# EAGLE board JesseMakeISC1 (EAGLE 7.5.0)
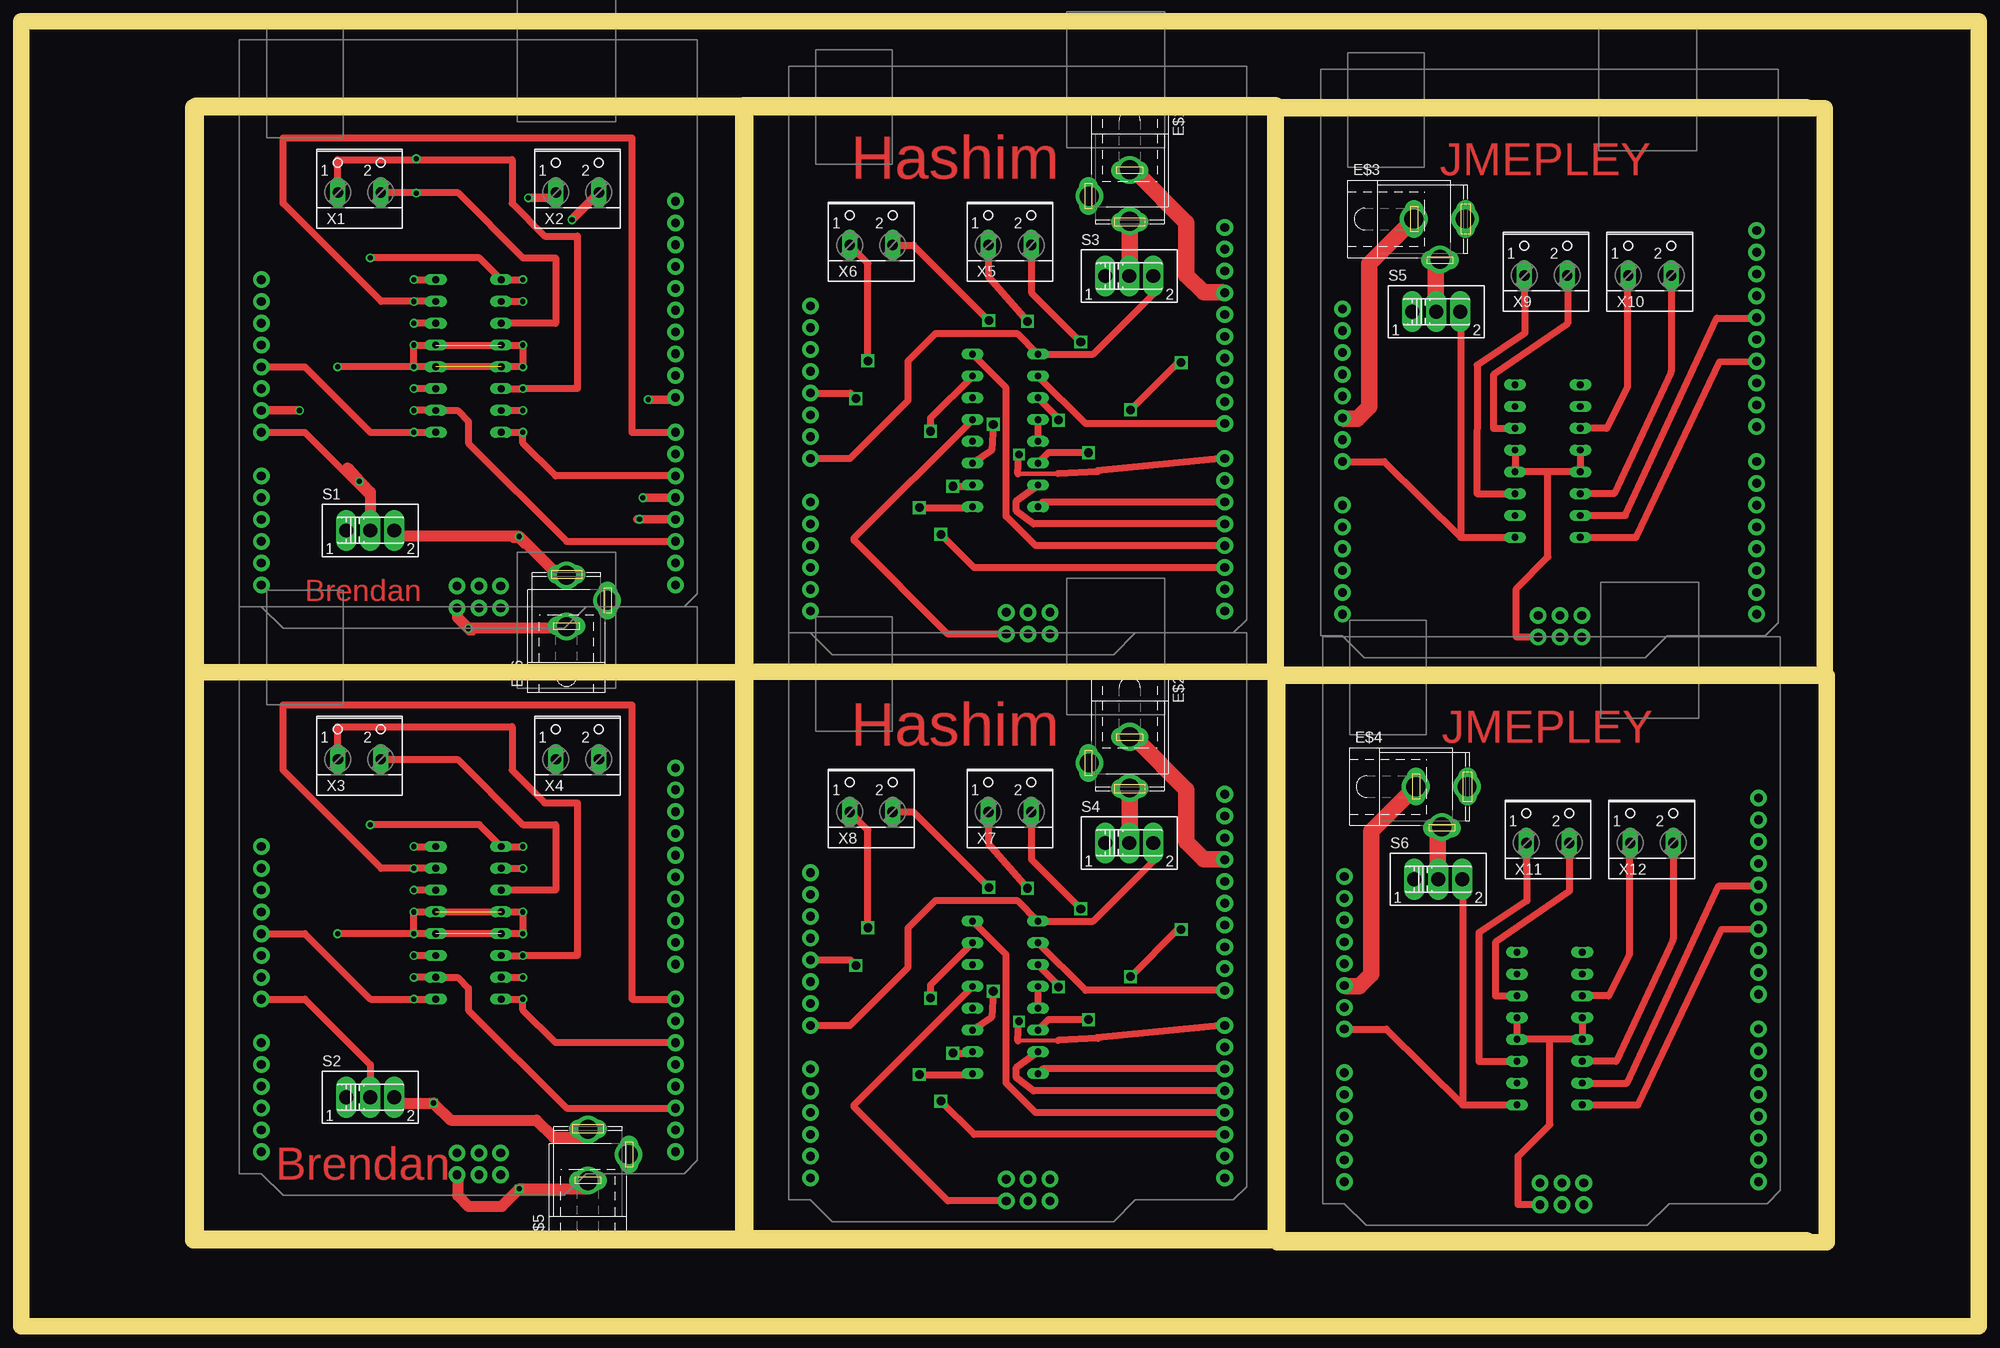
[diagram p0: board, top side]
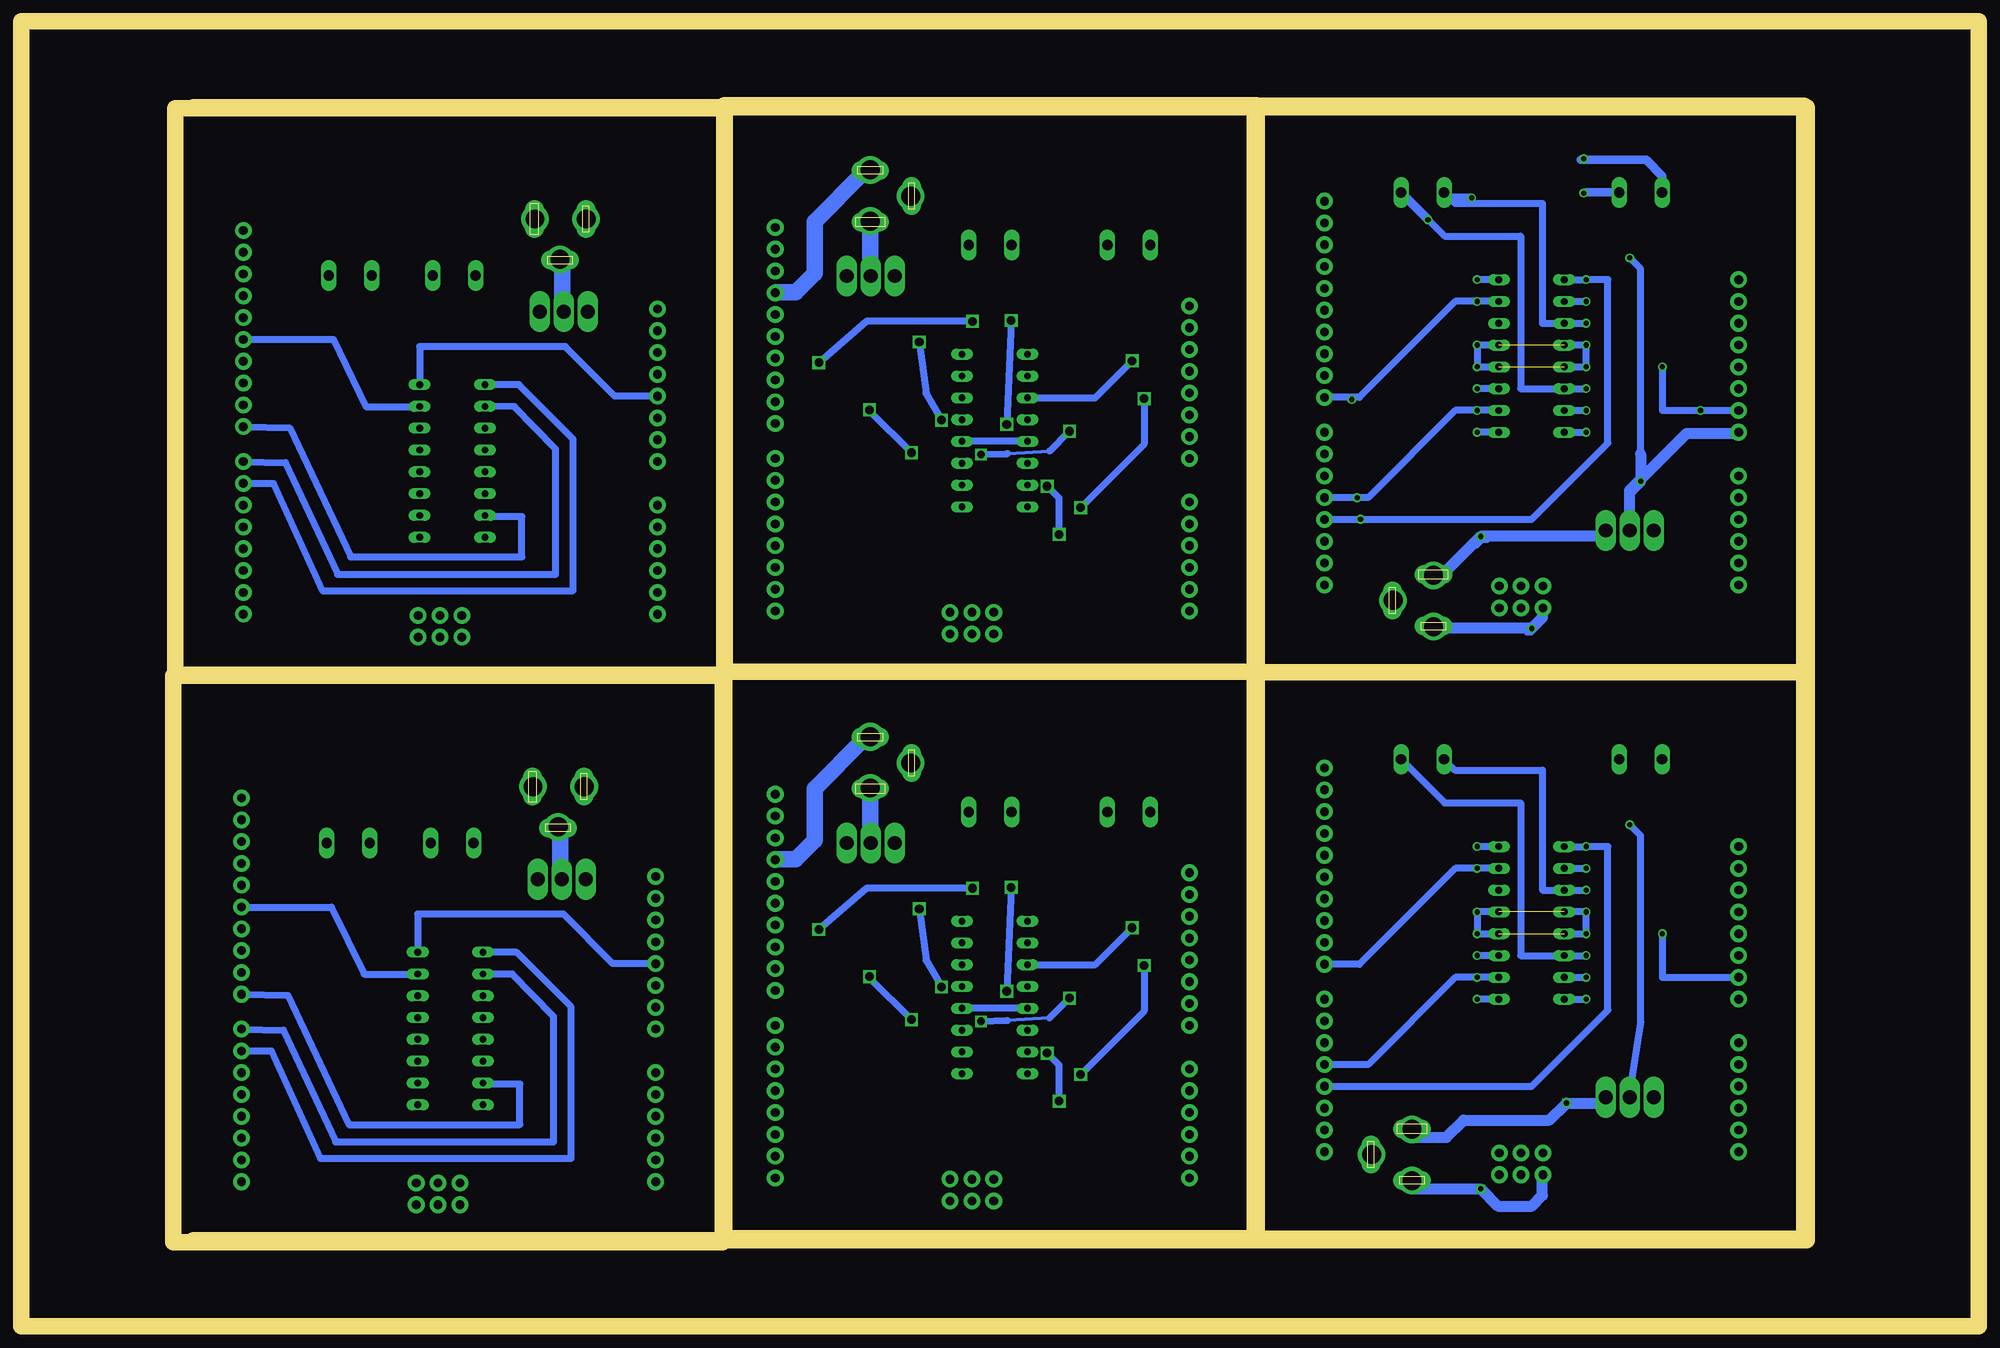
[diagram p1: board, bottom side, seen from below]

Size 228 x 152 mm. Coordinates in mm from the lower left corner, seen from the top.
Outline: 208,10 20,10 20,142 208,142
Outline: 84.32,10.16 120.32,10.16
Outline: 20.32,90.16 20.32,76.16
Outline: 20.32,76.16 20.32,10.16 84.32,10.16
Outline: 20.32,76.16 84.32,76.16 84.32,10.16
Outline: 146.11,10.21 184.11,10.21
Outline: 84.11,90.22 84.11,76.22
Outline: 84.11,76.22 84.11,10.21 146.11,10.21
Outline: 84.11,76.22 146.11,76.22 146.11,10.21
Outline: 0,0 0,152 228,152 228,0 0,0
Outline: 20.32,76.2 20.32,142.2 84.32,142.2 84.32,76.2 20.32,76.2
Outline: 84.11,76.25 84.11,142.25 146.11,142.25 146.11,76.25 84.11,76.25
Outline: 146.08,75.9 146.08,141.9 210.08,141.9 210.08,75.9 146.08,75.9
Outline: 146.3,9.78 146.3,75.78 210.3,75.78 210.3,9.78 146.3,9.78
Copper layers (1*16): Top 0.035mm / dielectric 1.5mm / Bottom 0.035mm
Design rules "default": minimum track width 10mil, minimum drill 0.6mm, track to track 8mil, track to pad 8mil, pad to pad 8mil, via to via 8mil, smd to smd 8mil, copper to edge 40mil, drill to drill 8mil, minimum pad ring 10mil, minimum via ring 8mil, stop-mask expansion 4mil, vias tented up to drill 0mil, thermal gap 10mil

## Footprints (pad centres in the part's own frame; a part is rotated, then mirrored left to right if it is on the bottom)
5.5-2.5-BARRELCONNECTOR = drill 0.8 pad 2.184 long: 1 -3,0; 2 0,-4.8 | drill 1 pad 2.184 long: 3 3,0 | drill 2.2: P$1 -3.048,0; P$2 2.921,0; P$3 0,-4.699
ARDUINO_R3 = drill 1.016 pad 1.93: 3.3V 35.56,2.54; 5V 38.1,2.54; A0 50.8,2.54; A1 53.34,2.54; A2 55.88,2.54; A3 58.42,2.54; A4 60.96,2.54; A5 63.5,2.54; AREF 23.876,50.8; D0 63.5,50.8; D1 60.96,50.8; D2 58.42,50.8; D3 55.88,50.8; D4 53.34,50.8; D5 50.8,50.8; D6 48.26,50.8; D7 45.72,50.8; D8 41.656,50.8; D9 39.116,50.8; D10 36.576,50.8; D11 34.036,50.8; D12 31.496,50.8; D13 28.956,50.8; GND@1 40.64,2.54; GND@2 43.18,2.54; GND@3 26.416,50.8; GND@4 66.18,25.35; IOREF 30.48,2.54; MISO 63.64,30.43; MOSI 66.18,27.89; NC 27.94,2.54; RESET@1 33.02,2.54; RESET@2 63.64,25.35; SCK 63.64,27.89; SCL 18.796,50.8; SDA 21.336,50.8; VCC 66.18,30.43; VIN 45.72,2.54
SLIDE_SWITCH = drill 1.6 long: 1 -2.794,0; 2 0,0; 3 2.794,0
DIP16 = drill 0.8 long: P1 -8.89,-3.81; P2 -6.35,-3.81; P3 -3.81,-3.81; P4 -1.27,-3.81; P5 1.27,-3.81; P6 3.81,-3.81; P7 6.35,-3.81; P8 8.89,-3.81; P9 8.89,3.81; P10 6.35,3.81; P11 3.81,3.81; P12 1.27,3.81; P13 -1.27,3.81; P14 -3.81,3.81; P15 -6.35,3.81; P16 -8.89,3.81
2PIN-SCREW-TERMINAL = drill 1.194 long: 1 -2.5,-1.27; 2 2.5,-1.27

## Placement (x,y rotation side)
E$1  [5.5-2.5-BARRELCONNECTOR]  129.11,131.66 270 top
E$2  [5.5-2.5-BARRELCONNECTOR]  129.11,65.61 270 top
E$3  [5.5-2.5-BARRELCONNECTOR]  165.26,128.99 0 top
E$4  [5.5-2.5-BARRELCONNECTOR]  165.48,62.87 0 top
E$5  [5.5-2.5-BARRELCONNECTOR]  66,20 90 top
E$6  [5.5-2.5-BARRELCONNECTOR]  63.5,84.55 90 top
J1  ARDUINO_UNO_R3  [ARDUINO_R3]  25.4,149.86 270 top
J2  ARDUINO_UNO_R3  [ARDUINO_R3]  25.4,83.82 270 top
J3  ARDUINO_UNO_R3  [ARDUINO_R3]  89.38,146.81 270 top
J4  ARDUINO_UNO_R3  [ARDUINO_R3]  89.38,80.77 270 top
J5  ARDUINO_UNO_R3  [ARDUINO_R3]  151.35,146.45 270 top
J6  ARDUINO_UNO_R3  [ARDUINO_R3]  151.57,80.33 270 top
S1  [SLIDE_SWITCH]  40.64,92.71 0 top
S2  [SLIDE_SWITCH]  40.64,26.67 0 top
S3  [SLIDE_SWITCH]  129.06,122.34 0 top
S4  [SLIDE_SWITCH]  129.06,56.3 0 top
S5  [SLIDE_SWITCH]  164.83,118.19 0 top
S6  [SLIDE_SWITCH]  165.06,52.07 0 top
U$1  MOTOR_DRIVERDIP16  [DIP16]  52.07,113.03 90 top
U$2  MOTOR_DRIVERDIP16  [DIP16]  52.07,46.99 90 top
U$3  MOTOR_DRIVERDIP16  [DIP16]  114.61,104.34 90 top
U$4  MOTOR_DRIVERDIP16  [DIP16]  114.61,38.3 90 top
U$5  MOTOR_DRIVERDIP16  [DIP16]  177.81,100.8 270 top
U$6  MOTOR_DRIVERDIP16  [DIP16]  178.03,34.68 270 top
X1  [2PIN-SCREW-TERMINAL]  39.37,133.35 0 top
X2  [2PIN-SCREW-TERMINAL]  64.77,133.35 0 top
X3  [2PIN-SCREW-TERMINAL]  39.37,67.31 0 top
X4  [2PIN-SCREW-TERMINAL]  64.77,67.31 0 top
X5  [2PIN-SCREW-TERMINAL]  115.15,127.22 0 top
X6  [2PIN-SCREW-TERMINAL]  98.99,127.22 0 top
X7  [2PIN-SCREW-TERMINAL]  115.15,61.17 0 top
X8  [2PIN-SCREW-TERMINAL]  98.99,61.17 0 top
X9  [2PIN-SCREW-TERMINAL]  177.6,123.68 0 top
X10  [2PIN-SCREW-TERMINAL]  189.69,123.68 0 top
X11  [2PIN-SCREW-TERMINAL]  177.82,57.56 0 top
X12  [2PIN-SCREW-TERMINAL]  189.92,57.56 0 top

## Library data of the parts
E$1-E$6 J1-J6 S1-S6 U$1-U$6 = ISCTrainingProgram
X1-X12 = ISCTrainingProgram; MPN: 237-102; OC_FARNELL: unknown; OC_NEWARK: 70K9898

## Nets
1A: J5.D7 U$5.P2
1A1: J6.D7 U$6.P2
2A: J5.D8 U$5.P7
2A1: J6.D8 U$6.P7
3A: J5.D13 U$5.P10
3A1: J6.D13 U$6.P10
4A: J5.D12 U$5.P15
4A1: J6.D12 U$6.P15
EN1: J5.D6 U$5.P1
EN2: J5.D11 U$5.P9
EN3: J6.D11 U$6.P9
EN4: J6.D6 U$6.P1
GND: U$3.P4 U$3.P5 U$3.P13
GND1: U$4.P4 U$4.P5 U$4.P13
GND2: J5.GND@4 U$5.P4 U$5.P5 U$5.P12 U$5.P13
GND3: J6.GND@4 U$6.P4 U$6.P5 U$6.P12 U$6.P13
N$1: U$1.P3 X1.1
N$2: U$1.P6 X1.2
N$3: U$1.P11 X2.1
N$4: U$1.P14 X2.2
N$5: J1.5V U$1.P16
N$6: J1.GND@2 U$1.P4 U$1.P5 U$1.P12 U$1.P13
N$8: J1.VIN S1.2 U$1.P8
N$9: J1.D2 U$1.P15
N$10: J1.D3 U$1.P9
N$11: J1.D4 U$1.P2
N$12: J1.D5 U$1.P1
N$13: J1.D7 U$1.P10
N$14: J1.D8 U$1.P7
N$15: U$2.P3 X3.1
N$16: U$2.P6 X3.2
N$17: U$2.P11 X4.1
N$18: U$2.P14 X4.2
N$19: J2.5V U$2.P16
N$20: J2.GND@2 U$2.P4 U$2.P5 U$2.P12 U$2.P13
N$21: J2.VIN S2.2
N$22: J2.D2 U$2.P15
N$23: J2.D3 U$2.P9
N$24: J2.D4 U$2.P2
N$25: J2.D5 U$2.P1
N$26: J2.D7 U$2.P10
N$27: J2.D8 U$2.P7
N$28: U$2.P8
N$29: U$3.P3 X5.1
N$30: U$3.P6 X5.2
N$31: U$3.P11 X6.1
N$32: U$3.P14 X6.2
N$33: J3.5V U$3.P16
N$34: J3.GND@4 U$3.P12
N$35: J3.VIN S3.3 U$3.P8
N$36: J3.D2 U$3.P15
N$37: J3.D3 U$3.P9
N$38: J3.D8 U$3.P7
N$39: J3.D7 U$3.P10
N$40: J3.D4 U$3.P2
N$41: J3.D5 U$3.P1
N$42: U$4.P3 X7.1
N$43: U$4.P6 X7.2
N$44: U$4.P11 X8.1
N$45: U$4.P14 X8.2
N$46: J4.5V U$4.P16
N$47: J4.GND@4 U$4.P12
N$48: J4.VIN S4.3 U$4.P8
N$49: J4.D2 U$4.P15
N$50: J4.D3 U$4.P9
N$51: J4.D8 U$4.P7
N$52: J4.D7 U$4.P10
N$53: J4.D4 U$4.P2
N$54: J4.D5 U$4.P1
N$55: U$5.P6 X9.1
N$56: U$5.P3 X9.2
N$57: U$5.P14 X10.1
N$58: U$5.P11 X10.2
N$59: J5.5V U$5.P16
N$60: J5.VIN S5.3 U$5.P8
N$61: U$6.P6 X11.1
N$62: U$6.P3 X11.2
N$63: U$6.P14 X12.1
N$64: U$6.P11 X12.2
N$65: J6.5V U$6.P16
N$66: J6.VIN S6.3 U$6.P8
S$5: E$3.P$1
S$7: E$4.P$1

## Tracks (layer width: path | path; a pad name or v marks a point on that pad's centre or on a via)
1A
  Bottom 0.813: J5.D7 197.26,100.6 191.16,87.58 165.76,87.58 165.76,102.19 170.57,107.14 U$5.P2
1A1
  Bottom 0.813: J6.D7 197.49,34.48 191.39,21.46 165.99,21.46 165.99,36.07 170.79,41.02 U$6.P2
2A
  Bottom 0.813: J5.D8 196.75,104.67 189.64,89.61 169.7,89.61 169.7,94.31 174,94.31 U$5.P7
2A1
  Bottom 0.813: J6.D8 196.98,38.55 189.87,23.5 169.93,23.5 169.93,28.19 174.22,28.19 U$6.P7
3A
  Top 0.813: U$5.P10 186.85,94.45 197.51,117.43 202.15,117.43 J5.D13
3A1
  Top 0.813: U$6.P10 187.07,28.33 197.74,51.31 202.37,51.31 J6.D13
4A
  Bottom 0.813: J5.D12 191.67,114.95 187.86,107.14 U$5.P15
4A1
  Bottom 0.813: J6.D12 191.9,48.83 188.09,41.02 U$6.P15
EN1
  Bottom 0.813: J5.D6 198.66,98.19 192.94,85.68 163.73,85.68 163.73,103.33 170.06,109.68 U$5.P1
EN2
  Top 0.813: U$5.P9 187.99,91.91 188.12,91.9 197.83,112.35 J5.D11
EN3
  Top 0.813: U$6.P9 188.21,25.79 188.34,25.78 198.06,46.23 J6.D11
EN4
  Bottom 0.813: J6.D6 198.88,32.07 193.17,19.56 163.96,19.56 163.96,37.21 170.29,43.56 U$6.P1
GND
  Top 0.813: U$3.P5 U$3.P4
  Bottom 0.813: U$3.P13 U$3.P4
GND1
  Top 0.813: U$4.P5 U$4.P4
  Bottom 0.813: U$4.P13 U$4.P4
GND2
  Top 0.813: U$5.P4 U$5.P5 177.83,99.53 | U$5.P13 U$5.P12 177.83,99.53 | J5.GND@4 174.15,80.27 174.15,85.93 177.83,89.61 177.83,99.53
GND3
  Top 0.813: U$6.P4 U$6.P5 178.05,33.41 | U$6.P13 U$6.P12 178.05,33.41 | J6.GND@4 174.37,14.15 174.37,19.81 178.05,23.5 178.05,33.41
N$1  (via drill 0.6)
  Top 0.813: U$1.P3 v58.42,109.22 64.77,109.22 64.77,127 60.96,127 57.15,130.81 57.15,135.89 36.83,135.89 36.83,132.12 X1.1
  Bottom 0.813: U$1.P3 v58.42,109.22
N$2
  Top 0.813: X1.2 50.8,132.08 58.42,124.46 62.23,124.46 62.23,116.84 U$1.P6
N$3  (via drill 0.6)
  Top 0.813: U$1.P11 v45.72,116.84
  Bottom 0.813: v45.72,116.84 U$1.P11 50.8,116.84 50.8,130.81 61,130.81 X2.1
N$4  (via drill 0.6)
  Top 0.813: U$1.P14 v45.72,109.22
  Bottom 0.813: v45.72,109.22 U$1.P14 53.34,109.22 53.34,127 62.19,127 X2.2
N$5  (via drill 0.6)
  Top 0.813: J1.5V 33.02,111.76 40.64,104.14 v45.72,104.14 U$1.P16
  Bottom 0.813: U$1.P16 v45.72,104.14
N$6  (via drill 0.6)  (2 unrouted)
  Top 0.813: v45.72,111.76 U$1.P13 U$1.P4 v58.42,111.76 v58.42,114.3 U$1.P12 v45.72,114.3 v45.72,111.76 | v45.72,111.76 v36.83,111.76
  Top 1.016: J1.GND@2 v32.38,106.68
  Bottom 0.813: U$1.P13 v45.72,111.76 v45.72,114.3 U$1.P12 | U$1.P5 v58.42,114.3 v58.42,111.76 U$1.P4 | v36.83,111.76 36.83,106.68 v32.38,106.68 J1.GND@2
N$8  (via drill 0.6)
  Top 0.813: v58.42,121.92 U$1.P8 53.34,124.46 v40.64,124.46 | J1.VIN 33.02,104.14 40.64,96.52 40.64,93.34 S1.2
  Top 1.27: 38,100 40,97.8 40.64,97.16 40.64,93.34
  Bottom 0.813: U$1.P8 v58.42,121.92 | 39.37,101.6 39.37,123.19 v40.64,124.46
  Bottom 1.27: 40.64,93.34 40.64,97.16 | 40.64,97.16 40.64,97.36 34,104 28,104 | 39.37,101.6 v39.37,98.42 40.64,97.16
N$9  (via drill 0.6)
  Top 0.813: J1.D2 63.5,91.44 52.07,102.87 52.07,105.41 50.8,106.68 U$1.P15 v45.72,106.68
  Bottom 0.813: U$1.P15 v45.72,106.68
N$10  (via drill 0.6)
  Top 0.813: v45.72,121.92 U$1.P9
  Top 1.016: 71.75,93.98 J1.D3
  Bottom 0.813: U$1.P9 v45.72,121.92 43.18,121.92 43.18,102.87 52.07,93.98 J1.D3
N$11  (via drill 0.6)
  Top 0.813: U$1.P2 v58.42,106.68
  Top 1.016: v72.39,96.52 J1.D4
  Bottom 0.813: v58.42,106.68 U$1.P2 60.96,106.68 71.12,96.52 v72.39,96.52 J1.D4
N$12  (via drill 0.6)
  Top 0.813: U$1.P1 v58.42,104.14 58.42,102.87 62.23,99.06 J1.D5
  Bottom 0.813: U$1.P1 v58.42,104.14
N$13  (via drill 0.6)
  Top 0.813: v45.72,119.38 U$1.P10 41.91,119.38 30.48,130.81 30.48,138.43 71.12,138.43 71.12,104.14 J1.D7
  Bottom 0.813: U$1.P10 v45.72,119.38
N$14  (via drill 0.6)
  Top 0.813: U$1.P7 v58.42,119.38
  Bottom 0.813: v58.42,119.38 U$1.P7 60.96,119.38 72.14,108.2 J1.D8
N$15  (via drill 0.6)
  Top 0.813: U$2.P3 v58.42,43.18 64.77,43.18 64.77,60.96 60.96,60.96 57.15,64.77 57.15,69.85 36.83,69.85 36.83,66.08 X3.1
  Bottom 0.813: U$2.P3 v58.42,43.18
N$16
  Top 0.813: X3.2 50.8,66.04 58.42,58.42 62.23,58.42 62.23,50.8 U$2.P6
N$17  (via drill 0.6)
  Top 0.813: U$2.P11 v45.72,50.8
  Bottom 0.813: v45.72,50.8 U$2.P11 50.8,50.8 50.8,64.77 61,64.77 X4.1
N$18  (via drill 0.6)
  Top 0.813: U$2.P14 v45.72,43.18
  Bottom 0.813: v45.72,43.18 U$2.P14 53.34,43.18 53.34,60.96 62.19,60.96 X4.2
N$19  (via drill 0.6)
  Top 0.813: J2.5V 33.02,45.72 40.64,38.1 v45.72,38.1 U$2.P16
  Bottom 0.813: U$2.P16 v45.72,38.1
N$20  (via drill 0.6)  (2 unrouted)
  Top 0.813: v45.72,45.72 U$2.P13 U$2.P4 v58.42,45.72 v58.42,48.26 U$2.P12 v45.72,48.26 v45.72,45.72 | v45.72,45.72 v36.83,45.72
  Bottom 0.813: U$2.P13 v45.72,45.72 v45.72,48.26 U$2.P12 | U$2.P5 v58.42,48.26 v58.42,45.72 U$2.P4 | v36.83,45.72 36.83,40.64 J2.GND@2
N$21
  Top 0.813: J2.VIN 33.02,38.1 40.64,30.48 S2.2
N$22  (via drill 0.6)
  Top 0.813: J2.D2 63.5,25.4 52.07,36.83 52.07,39.37 50.8,40.64 U$2.P15 v45.72,40.64
  Bottom 0.813: U$2.P15 v45.72,40.64
N$23  (via drill 0.6)
  Top 0.813: v45.72,55.88 U$2.P9
  Bottom 0.813: U$2.P9 v45.72,55.88 43.18,55.88 43.18,36.83 52.07,27.94 J2.D3
N$24  (via drill 0.6)
  Top 0.813: U$2.P2 v58.42,40.64
  Bottom 0.813: v58.42,40.64 U$2.P2 60.96,40.64 71.12,30.48 J2.D4
N$25  (via drill 0.6)
  Top 0.813: U$2.P1 v58.42,38.1 58.42,36.83 62.23,33.02 J2.D5
  Bottom 0.813: U$2.P1 v58.42,38.1
N$26  (via drill 0.6)
  Top 0.813: v45.72,53.34 U$2.P10 41.91,53.34 30.48,64.77 30.48,72.39 71.12,72.39 71.12,38.1 J2.D7
  Bottom 0.813: U$2.P10 v45.72,53.34
N$27  (via drill 0.6)
  Top 0.813: U$2.P7 v58.42,53.34
  Bottom 0.813: v58.42,53.34 U$2.P7 60.96,53.34 72.14,42.16 J2.D8
N$28  (via drill 0.6)
  Top 0.813: v58.42,55.88 U$2.P8 53.34,58.42 v40.64,58.42
  Bottom 0.813: U$2.P8 v58.42,55.88 | 40.7,27.05 39.37,35.56 39.37,57.15 v40.64,58.42
N$29  (via drill 1)
  Top 0.813: X5.1 112.65,122.31 v117.21,117.06 | v135.11,112.25 134.71,112.25 v129.21,106.75 | v124.31,101.75 119.64,101.75 U$3.P3
  Bottom 0.813: v117.21,117.06 129.61,117.06 v135.11,112.25 | v129.21,106.75 129.21,106.66 v124.31,101.75
N$30  (via drill 1)
  Top 0.813: X5.2 117.65,120.42 v123.41,114.66 | v120.81,105.56 120.91,105.67 U$3.P6
  Bottom 0.813: v123.41,114.66 122.61,108.66 v120.81,105.56
N$31  (via drill 1)
  Top 0.813: v98.61,112.45 98.61,123.83 X6.1
  Bottom 0.813: U$3.P11 102.91,108.16 v98.61,112.45
N$32  (via drill 1)
  Top 0.813: X6.2 103.92,125.94 v112.71,117.16 | v113.21,105.06 113.01,102.05 U$3.P14
  Bottom 0.813: v112.71,117.16 v113.21,105.06
N$33  (via drill 1)
  Top 0.813: J3.5V 96.56,108.7 v97.21,108.06 | v104.61,95.36 110.7,95.36 U$3.P16
  Bottom 0.813: v97.21,108.06 97.21,102.75 v104.61,95.36
N$34
  Top 0.813: J3.GND@4 107.94,80.62 97.01,91.56 97.01,91.83 U$3.P12
N$35
  Top 0.813: J3.VIN 96.54,101.08 103.31,107.86 103.31,112.45 106.51,115.66 116,115.66 U$3.P8 124.89,113.23 131.91,120.25 131.81,122.06 131.81,122.86 131.64,122.86 S3.3
N$36  (via drill 1)
  Top 0.813: J3.D2 110.98,88.39 v107.11,92.25 | v108.51,97.86 110.66,97.86 U$3.P15
  Bottom 0.813: v107.11,92.25 107.11,96.45 v108.51,97.86
N$37
  Top 0.813: J3.D3 118.14,90.92 114.71,94.36 114.71,109.33 U$3.P9
N$38
  Top 0.813: J3.D8 123.97,105.15 U$3.P7
N$39  (via drill 0.9, 1)
  Top 0.5: 120.78,99.33 116.08,99.28
  Top 0.813: J3.D7 125.31,99.66 125.41,99.66 125.41,99.56 120.78,99.33 | 116.08,99.28 v116.21,101.56 | v105.91,104.25 105.91,105.81 U$3.P10
  Bottom 0.406: 113.11,101.66 108.21,101.95
  Bottom 0.813: v116.21,101.56 113.21,101.66 113.11,101.66 | 108.21,101.95 v105.91,104.25
N$40
  Top 0.813: J3.D4 117.9,93.47 115.91,94.95 115.91,96.19 U$3.P2
N$41
  Top 0.813: J3.D5 118.97,96 U$3.P1
N$42  (via drill 1)
  Top 0.813: X7.1 112.65,56.27 v117.21,51.02 | v135.11,46.22 134.71,46.22 v129.21,40.72 | v124.31,35.72 119.64,35.72 U$4.P3
  Bottom 0.813: v117.21,51.02 129.61,51.02 v135.11,46.22 | v129.21,40.72 129.21,40.62 v124.31,35.72
N$43  (via drill 1)
  Top 0.813: X7.2 117.65,54.38 v123.41,48.62 | v120.81,39.52 120.91,39.62 U$4.P6
  Bottom 0.813: v123.41,48.62 122.61,42.62 v120.81,39.52
N$44  (via drill 1)
  Top 0.813: v98.61,46.41 98.61,57.78 X8.1
  Bottom 0.813: U$4.P11 102.91,42.12 v98.61,46.41
N$45  (via drill 1)
  Top 0.813: X8.2 103.92,59.91 v112.71,51.12 | v113.21,39.02 113.01,36.01 U$4.P14
  Bottom 0.813: v112.71,51.12 v113.21,39.02
N$46  (via drill 1)
  Top 0.813: J4.5V 96.56,42.66 v97.21,42.02 | v104.61,29.32 110.7,29.32 U$4.P16
  Bottom 0.813: v97.21,42.02 97.21,36.72 v104.61,29.32
N$47
  Top 0.813: J4.GND@4 107.94,14.59 97.01,25.52 97.01,25.79 U$4.P12
N$48
  Top 0.813: J4.VIN 96.54,35.05 103.31,41.81 103.31,46.41 106.51,49.62 116,49.62 U$4.P8 124.89,47.2 131.91,54.22 131.81,56.02 131.81,56.81 131.64,56.81 S4.3
N$49  (via drill 1)
  Top 0.813: J4.D2 110.98,22.34 v107.11,26.21 | v108.51,31.82 110.66,31.82 U$4.P15
  Bottom 0.813: v107.11,26.21 107.11,30.41 v108.51,31.82
N$50
  Top 0.813: J4.D3 118.14,24.89 114.71,28.32 114.71,43.28 U$4.P9
N$51
  Top 0.813: J4.D8 123.97,39.11 U$4.P7
N$52  (via drill 0.9, 1)
  Top 0.5: 120.78,33.28 116.08,33.24
  Top 0.813: J4.D7 125.31,33.62 125.41,33.62 125.41,33.52 120.78,33.28 | 116.08,33.24 v116.21,35.52 | v105.91,38.22 105.91,39.77 U$4.P10
  Bottom 0.406: 113.11,35.62 108.21,35.91
  Bottom 0.813: v116.21,35.52 113.21,35.62 113.11,35.62 | 108.21,35.91 v105.91,38.22
N$53
  Top 0.813: J4.D4 117.9,27.43 115.91,28.91 115.91,30.14 U$4.P2
N$54
  Top 0.813: J4.D5 118.97,29.96 U$4.P1
N$55
  Top 0.813: X9.1 175.16,115.68 169.57,111.97 169.55,96.98 U$5.P6
N$56
  Top 0.813: X9.2 180.12,120.76 180.12,116.79 171.48,110.82 171.48,104.6 U$5.P3
N$57
  Top 0.813: X10.1 187.1,120.76 187.1,109.43 184.67,104.6 U$5.P14
N$58
  Top 0.813: X10.2 192.18,120.76 192.18,111.2 185.56,96.98 U$5.P11
N$59
  Bottom 0.813: J5.5V 158.91,108.35 164.62,114.13 181.62,114.13 U$5.P16
N$60
  Top 0.813: J5.VIN 158.78,100.73 167.67,91.9 | 167.67,91.9 U$5.P8 | S5.3 167.67,118.32 167.67,91.9
N$61
  Top 0.813: X11.1 175.39,49.56 169.8,45.85 169.78,30.86 U$6.P6
N$62
  Top 0.813: X11.2 180.34,54.64 180.34,50.67 171.7,44.7 171.7,38.48 U$6.P3
N$63
  Top 0.813: X12.1 187.32,54.64 187.32,43.31 184.89,38.48 U$6.P14
N$64
  Top 0.813: X12.2 192.41,54.64 192.41,45.09 185.78,30.86 U$6.P11
N$65
  Bottom 0.813: J6.5V 159.13,42.23 164.85,48.01 181.84,48.01 U$6.P16
N$66
  Top 0.813: J6.VIN 159,34.61 167.89,25.78 | 167.89,25.78 U$6.P8 | S6.3 167.89,52.2 167.89,25.78
S$1
  Top 1.93: 129.11,128.16 129.11,123.95
  Bottom 1.93: 129.11,124.45 129.11,128.16
S$2
  Top 1.93: 139.91,120.45 137.71,120.45 135.71,122.45 135.71,128.56 129.91,134.35
  Bottom 1.93: 129.91,134.35 135.61,128.66 135.61,122.66 137.81,120.45 140.11,120.45
S$3
  Top 1.93: 129.11,62.12 129.11,57.91
  Bottom 1.93: 129.11,58.41 129.11,62.12
S$4
  Top 1.93: 139.91,54.41 137.71,54.41 135.71,56.41 135.71,62.52 129.91,68.31
  Bottom 1.93: 129.91,68.31 135.61,62.62 135.61,56.62 137.81,54.41 140.11,54.41
S$5
  Top 1.93: 154.08,105.74 155.6,105.74 157,107.14 157,123.78 E$3.P$1
S$6
  Top 1.93: 164.75,119.97 164.75,123.78 165,124.03
  Bottom 1.93: 165,124.03 165,119.59
S$7
  Top 1.93: 154.31,39.62 155.83,39.62 157.23,41.02 157.23,57.66 E$4.P$1
S$8
  Top 1.93: 164.97,53.85 164.97,57.66 165.23,57.91
  Bottom 1.93: 165.23,57.91 165.23,53.47
S$9  (via drill 0.6)
  Top 1.27: 44,26 v48,26 50,24 60,24 62,22 66,22
  Bottom 1.27: 66,22 62,22 60,24 50,24 v48,26 44,26
S$10  (via drill 0.6)
  Top 1.27: 50.8,17.78 50.8,15.24 52.07,13.97 55.97,13.97 v58,16 66,16
  Bottom 1.27: 66,16 v58,16 56,14 52,14 52,14.04 50.8,15.24 50.8,17.78
S$11  (via drill 0.6)
  Top 1.27: 63.5,81.28 v52.07,81.28 50.8,82.55 50.8,83.82
  Bottom 1.27: 50.8,83.82 50.8,82.55 v52.07,81.28 63.5,81.28
S$12
  Bottom 0.406: 57.15,91.44 57.78,91.44 58.42,90.81
S$13  (via drill 0.6)
  Top 1.27: 62,88 v58,92 44,92
  Bottom 1.27: 44,92 v58,92 62,88
S$14
  Top 0.406: 52.7,80.64 52.07,80.64 51.44,81.28
  Bottom 0.406: 51.44,81.28 52.07,80.64 52.7,80.64
S$15
  Top 0.406: 57.15,91.44 57.78,91.44 58.42,90.81
S$16  (via drill 0.6)
  other vias: 72,94
S$17  (via drill 0.6)
  Top 1.016: v73.03,107.95 76.2,107.95
S$18  (via drill 0.6)
  other vias: 46,132
S$19  (via drill 0.6)
  other vias: 46,136
S$20  (via drill 0.6)
  Top 1.016: v64.14,128.91 67.31,132.08
  Bottom 1.016: v64.14,128.91 67.31,132.08
S$21  (via drill 0.6)
  Top 1.016: v59.05,131.44 61.59,131.44 62.23,132.08
  Bottom 1.016: v59.05,131.44 61.59,131.44 62.23,132.08
S$22
  Bottom 1.016: 45.72,132.08 41.91,132.08
S$23
  Bottom 1.016: 46.35,135.89 38.73,135.89 36.83,133.99 36.83,132.08

## Text on the board
Top: Hashim | JMEPLEY | Brendan | Hashim | JMEPLEY | Brendan